# EAGLE board cortex-mpu-2 (EAGLE 7.3.0)

Size 100 x 80 mm. Coordinates in mm from the lower left corner, seen from the top.
Outline: 0,0 100,0 100,80 0,80 0,0
Copper layers (1*16): Top 0.035mm / dielectric 1.5mm / Bottom 0.035mm
Design rules "default": minimum track width 10mil, minimum drill 24mil, track to track 8mil, track to pad 8mil, pad to pad 8mil, via to via 8mil, smd to smd 8mil, copper to edge 40mil, drill to drill 8mil, minimum pad ring 10mil, minimum via ring 8mil, stop-mask expansion 4mil, vias tented up to drill 0mil, thermal gap 10mil

## Footprints (pad centres in the part's own frame; a part is rotated, then mirrored left to right if it is on the bottom)
0603-CAP = smd 1.1 x 1: 1 -0.85,0; 2 0.85,0
LED-0603 = smd 1 x 1: A 0,-0.877; C 0,0.877
SOT223 = smd 1.219 x 2.235: 1 -2.311,-3.099; 2 0,-3.099; 3 2.311,-3.099 | smd 3.6 x 2.2: TAB 0,3.099
1X02_LOCK = drill 1.016 pad 1.88: 1 -0.178,0; 2 2.718,0
1X06_LOCK = drill 1.016 pad 1.88: 1 0,0; 2 2.54,-0.254; 3 5.08,0; 4 7.62,-0.254; 5 10.16,0; 6 12.7,-0.254
USB-B-MICRO-SMD_V03 = smd 1.45 x 0.4: D+1 2.725,0; D-1 2.725,0.65; GND1 2.725,-1.3; ID1 2.725,-0.65; VBUS1 2.725,1.3 | smd 1.5 x 1.8: SHIELD1 0,3.685; SHIELD2 0,-3.685 | smd 1.5 x 2.5: SHIELD3 0,0 | hole 0.85: 2.2,1.9; 2.2,-1.9
0603 = smd 1.1 x 1: 1 -0.85,0; 2 0.85,0
0603-RES = smd 1.1 x 1: 1 -0.85,0; 2 0.85,0
TACTILE_SWITCH_TALL = smd 1.55 x 1.3: A1 -3.975,-2.25; A2 3.975,-2.25; B1 -3.975,2.25; B2 3.975,2.25
PAD.02X.02 = smd 0.508 x 0.508: P$1 0,0
QFP50P900X900X120-48N = smd 1.473 x 0.279: 1 -4.115,2.743; 2 -4.115,2.261; 3 -4.115,1.753; 4 -4.115,1.245; 5 -4.115,0.762; 6 -4.115,0.254; 7 -4.115,-0.254; 8 -4.115,-0.762; 9 -4.115,-1.245; 10 -4.115,-1.753; 11 -4.115,-2.261; 12 -4.115,-2.743; 25 4.115,-2.743; 26 4.115,-2.261; 27 4.115,-1.753; 28 4.115,-1.245; 29 4.115,-0.762; 30 4.115,-0.254; 31 4.115,0.254; 32 4.115,0.762; 33 4.115,1.245; 34 4.115,1.753; 35 4.115,2.261; 36 4.115,2.743 | smd 0.279 x 1.473: 13 -2.743,-4.115; 14 -2.261,-4.115; 15 -1.753,-4.115; 16 -1.245,-4.115; 17 -0.762,-4.115; 18 -0.254,-4.115; 19 0.254,-4.115; 20 0.762,-4.115; 21 1.245,-4.115; 22 1.753,-4.115; 23 2.261,-4.115; 24 2.743,-4.115; 37 2.743,4.115; 38 2.261,4.115; 39 1.753,4.115; 40 1.245,4.115; 41 0.762,4.115; 42 0.254,4.115; 43 -0.254,4.115; 44 -0.762,4.115; 45 -1.245,4.115; 46 -1.753,4.115; 47 -2.261,4.115; 48 -2.743,4.115
QFN-24-NP = smd 0.8 x 0.3: 1 -2,1.25; 2 -2,0.75; 3 -2,0.25; 4 -2,-0.25; 5 -2,-0.75; 6 -2,-1.25; 13 2,-1.25; 14 2,-0.75; 15 2,-0.25; 16 2,0.25; 17 2,0.75; 18 2,1.25 | smd 0.3 x 0.8: 7 -1.25,-2; 8 -0.75,-2; 9 -0.25,-2; 10 0.25,-2; 11 0.75,-2; 12 1.25,-2; 19 1.25,2; 20 0.75,2; 21 0.25,2; 22 -0.25,2; 23 -0.75,2; 24 -1.25,2
JUN-2 = smd 0.5 x 0.5: A -0.25,0; B 0.25,0
CRYSTAL-TXC-7A = smd 1.7 x 2.4: P$1 1.85,0; P$2 -1.85,0

## Placement (x,y rotation side)
C1  100nF  [0603-CAP]  20.32,38.1 90 bottom
C2  100nF  [0603-CAP]  11.43,24.13 0 bottom
C3  100nF  [0603-CAP]  24.13,19.05 270 bottom
C4  100nF  [0603-CAP]  22.86,38.1 90 bottom
C5  100nF  [0603-CAP]  17.78,38.1 90 bottom
C6  100nF  [0603-CAP]  26.67,19.05 270 bottom
C7  100nF  [0603-CAP]  29.21,26.67 180 bottom
C8  100nF  [0603-CAP]  13.97,19.05 270 bottom
C9  1nF  [0603-CAP]  21.59,19.05 270 bottom
C10  4.7uF  [0603-CAP]  29.21,22.86 180 bottom
C11  470pF  [0603-CAP]  16.51,19.05 270 bottom
C12  2.2uF  [0603-CAP]  19.05,19.05 270 bottom
C13  1uF  [0603-CAP]  11.43,21.59 0 bottom
C14  10nF  [0603-CAP]  11.43,26.67 0 bottom
C15  10nF  [0603-CAP]  38.1,2.54 0 top
C16  0.1uF  [0603-CAP]  38.1,6.35 0 top
C17  2.2nF  [0603-CAP]  31.75,19.05 0 top
C18  0.1uF  [0603-CAP]  33.02,2.54 180 top
C19  100nF  [0603-CAP]  39.37,13.97 90 bottom
C20  100nF  [0603-CAP]  30.48,13.97 90 bottom
C21  10uF  [0603-CAP]  17.78,12.7 0 bottom
C22  22pF  [0603-CAP]  35.56,24.13 90 top
C23  100nF  [0603-CAP]  11.43,19.05 180 top
C24  10uF  [0603-CAP]  13.97,12.7 180 bottom
C25  22pF  [0603-CAP]  35.56,29.21 270 top
D1  GREEN  [LED-0603]  11.43,22.86 270 top
D2  GREEN  [LED-0603]  31.75,31.75 270 top
D3  GREEN  [LED-0603]  31.75,34.29 90 top
D4  GREEN  [LED-0603]  31.75,36.83 90 top
D5  GREEN  [LED-0603]  11.43,25.4 270 top
D6  BLUE  [LED-0603]  22.86,3.81 180 top
IC1  LM1117MPX-3.3  [SOT223]  16.51,6.35 180 bottom
JP1  [1X02_LOCK]  6.35,5.08 270 top
JP2  [1X06_LOCK]  6.35,10.16 90 top
JP3  [USB-B-MICRO-SMD_V03]  16.51,2.54 90 top
L1  3.3uH  [0603]  15.24,19.05 180 top
LOGO1  OSHW-LOGOS-COPPER  [OSHW-LOGO-S_COPPER]  11.43,36.83 0 top
R1  10kR  [0603-RES]  38.1,11.43 180 top
R2  10kR  [0603-RES]  38.1,13.97 180 top
R3  10k  [0603-RES]  35.56,13.97 90 bottom
R4  10k  [0603-RES]  26.67,13.97 270 bottom
R5  150R  [0603-RES]  6.35,26.67 180 top
R6  150R  [0603-RES]  21.59,12.7 0 top
R7  150R  [0603-RES]  35.56,34.29 0 top
R8  150R  [0603-RES]  35.56,36.83 0 top
R9  150R  [0603-RES]  6.35,30.48 180 top
R10  1kR  [0603-RES]  22.86,7.62 90 top
R11  39R  [0603-RES]  16.51,10.16 90 top
R12  39R  [0603-RES]  13.97,10.16 90 top
S1  2SMD4  [TACTILE_SWITCH_TALL]  29.21,6.35 90 bottom
S2  2SMD-4  [TACTILE_SWITCH_TALL]  36.83,6.35 90 bottom
TP1  [PAD.02X.02]  29.21,34.29 0 top
TP2  [PAD.02X.02]  29.21,36.83 0 top
TP3  [PAD.02X.02]  12.7,29.21 0 top
TP4  [PAD.02X.02]  12.7,27.94 0 top
TP5  [PAD.02X.02]  30.48,13.97 0 top
TP6  [PAD.02X.02]  31.75,13.97 0 top
TP7  [PAD.02X.02]  36.83,7.62 0 top
TP8  [PAD.02X.02]  36.83,16.51 0 top
TP9  [PAD.02X.02]  27.94,3.81 0 top
TP10  [PAD.02X.02]  25.4,5.08 0 top
U1  AT32UC3B164-AUT  [QFP50P900X900X120-48N]  20.32,29.21 0 top
U2  [QFN-24-NP]  33.02,8.89 0 top
U$1  JUNCTION  [JUN-2]  19.05,30.48 180 top
U$2  JUNCTION  [JUN-2]  19.05,27.94 180 top
U$3  JUNCTION  [JUN-2]  21.59,27.94 0 top
U$4  JUNCTION  [JUN-2]  21.59,30.48 180 top
Y1  7A-16  [CRYSTAL-TXC-7A]  39.37,26.67 270 top

## Library data of the parts
C1-C25 L1 R1-R12 TP1-TP10 = SparkFun-Passives
D1-D5 = SparkFun-LED; PROD_ID: DIO-00821
D6 = SparkFun-LED; PROD_ID: DIO-08575
IC1 = lm1117
JP1 JP2 = SparkFun-Connectors
JP3 = SparkFun-Connectors; PROD_ID: CONN-11752
LOGO1 = SparkFun-Aesthetics
S1 S2 = SparkFun-Electromechanical; PROD_ID: SWCH-11966
U1 = Atmel_By_element14_Batch_1-00; DESCRIPTION: MCU; MPN: AT32UC3B164-AUT; OC_FARNELL: 1841642; OC_NEWARK: 12T1375; PACKAGE: QFP-48; SUPPLIER: Atmel
U2 = SparkFun-Sensors
U$1-U$4 = ANS
Y1 = SparkFun-FreqCtrl

## Nets
ADVREF: C13.1 C14.1 U1.14
DM: R12.2 U1.39
DP: R11.2 U1.38
E_SDA: TP10.P$1 U2.6
GND: C1.2 C2.2 C3.2 C4.2 C5.2 C6.2 C7.2 C8.2 C9.2 C10.2 C11.2 C12.2 C13.2 C14.2 C15.2 C16.2 C17.2 C18.2 C19.1 C20.1 C21.2 C22.2 C23.1 C24.2 C25.2 D6.C IC1.1 JP1.2 JP2.6 JP3.GND1 JP3.SHIELD1 JP3.SHIELD2 JP3.SHIELD3 S1.B2 S2.B2 U1.1 U1.13 U1.19 U1.37 U2.1 U2.9 U2.11 U2.15 U2.17 U2.18
N$1: JP3.D-1 R12.1
N$2: JP3.D+1 R11.1
N$3: D1.A R5.1
N$4: D2.A R6.1
N$5: D6.A R10.1
N$6: D3.A R7.1
N$7: D4.A R8.1
N$8: D5.A R9.1
N$10: C18.1 U2.10
N$11: C17.1 U2.20
N$14: TP9.P$1 U2.7
N$16: TP8.P$1 U2.22
PA0: U1.3
PA1: U1.4
PA2: U1.5
PA3: TP3.P$1 U1.7
PA4: TP4.P$1 U1.8
PA5: TP7.P$1 U1.9 U2.12
PA6: U1.10
PA7: D5.C U1.11
PA8: D1.C U1.12
PA9: D2.C R2.1 TP6.P$1 U1.20 U2.23
PA10: R1.1 TP5.P$1 U1.21 U2.24
PA11: U1.22
PA12: U1.23
PA13: C19.2 R4.1 S1.A2 U1.25
PA14: JP2.5 U1.26
PA15: JP2.3 U1.27
PA16: JP2.2 U1.28
PA17: U1.29
PA18: C22.1 U1.30 Y1.P$1
PA19: C25.1 U1.31 Y1.P$2
PA20: U1.32
PA21: D3.C TP1.P$1 U1.33
PA22: D4.C TP2.P$1 U1.34
PA23: U1.35
PA24: U1.43
PA25: JP2.4 U1.44
PA26: JP3.ID1 U1.45
PA27: U1.46
RESET_N: C20.2 R3.1 S2.A2 U1.47
VBUS: C21.1 IC1.3 JP1.1 JP3.VBUS1
VCC: C15.1 C16.1 C23.2 C24.1 IC1.2 IC1.TAB JP2.1 L1.1 R1.2 R2.2 R3.2 R4.2 R5.2 R6.2 R7.2 R8.2 R9.2 R10.2 U2.3 U2.8 U2.13
VDDANA: C8.1 L1.2 U1.15
VDDCORE0: C1.1 U1.42 U$1.B
VDDCORE1: C2.1 U1.6 U$2.B
VDDCORE2: C3.1 U1.18 U$3.B
VDDIN: C9.1 C10.1 U1.17
VDDIO0: C5.1 U1.48
VDDIO1: C6.1 U1.24
VDDIO2: C7.1 U1.36
VDDOUT: C11.1 C12.1 U1.16 U$1.A U$2.A U$3.A U$4.A
VDDPLL: C4.1 U1.41 U$4.B

## Tracks (layer width: path | path; a pad name or v marks a point on that pad's centre or on a via)
ADVREF  (2 unrouted)
DM  (1 unrouted)
DP  (1 unrouted)
E_SDA  (1 unrouted)
GND  (44 unrouted)
N$1  (1 unrouted)
N$2  (1 unrouted)
N$3  (1 unrouted)
N$4  (1 unrouted)
N$5  (1 unrouted)
N$6  (1 unrouted)
N$7  (1 unrouted)
N$8  (1 unrouted)
N$10  (1 unrouted)
N$11  (1 unrouted)
N$14  (1 unrouted)
N$16  (1 unrouted)
PA3  (1 unrouted)
PA4  (1 unrouted)
PA5  (2 unrouted)
PA7  (1 unrouted)
PA8  (1 unrouted)
PA9  (4 unrouted)
PA10  (3 unrouted)
PA13  (3 unrouted)
PA14  (1 unrouted)
PA15  (1 unrouted)
PA16  (1 unrouted)
PA18  (2 unrouted)
PA19  (2 unrouted)
PA21  (2 unrouted)
PA22  (2 unrouted)
PA25  (1 unrouted)
PA26  (1 unrouted)
RESET_N  (3 unrouted)
VBUS  (3 unrouted)
VCC  (20 unrouted)
VDDANA  (2 unrouted)
VDDCORE0  (2 unrouted)
VDDCORE1  (2 unrouted)
VDDCORE2  (2 unrouted)
VDDIN  (2 unrouted)
VDDIO0  (1 unrouted)
VDDIO1  (1 unrouted)
VDDIO2  (1 unrouted)
VDDOUT  (6 unrouted)
VDDPLL  (2 unrouted)